# Altium PCB Back.PcbDoc
Units mm, origin at the board's own origin, x right, y up, seen from the top; angles counter-clockwise.
Board outline 72.04 x 19.15 mm, 2 copper layers (Top Layer, Bottom Layer), stack 1.071 mm thick; 13 components, 10 nets, 39 pads, 0 vias.
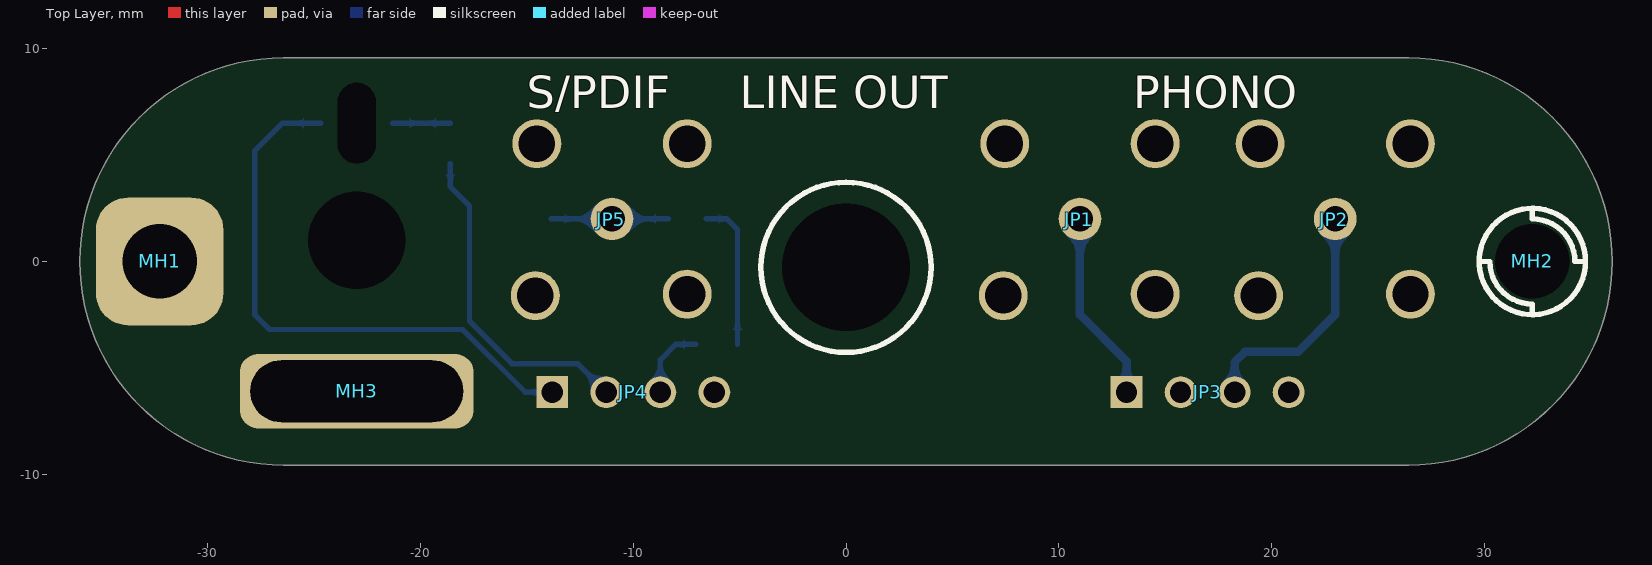
[diagram p0: Top Layer view]
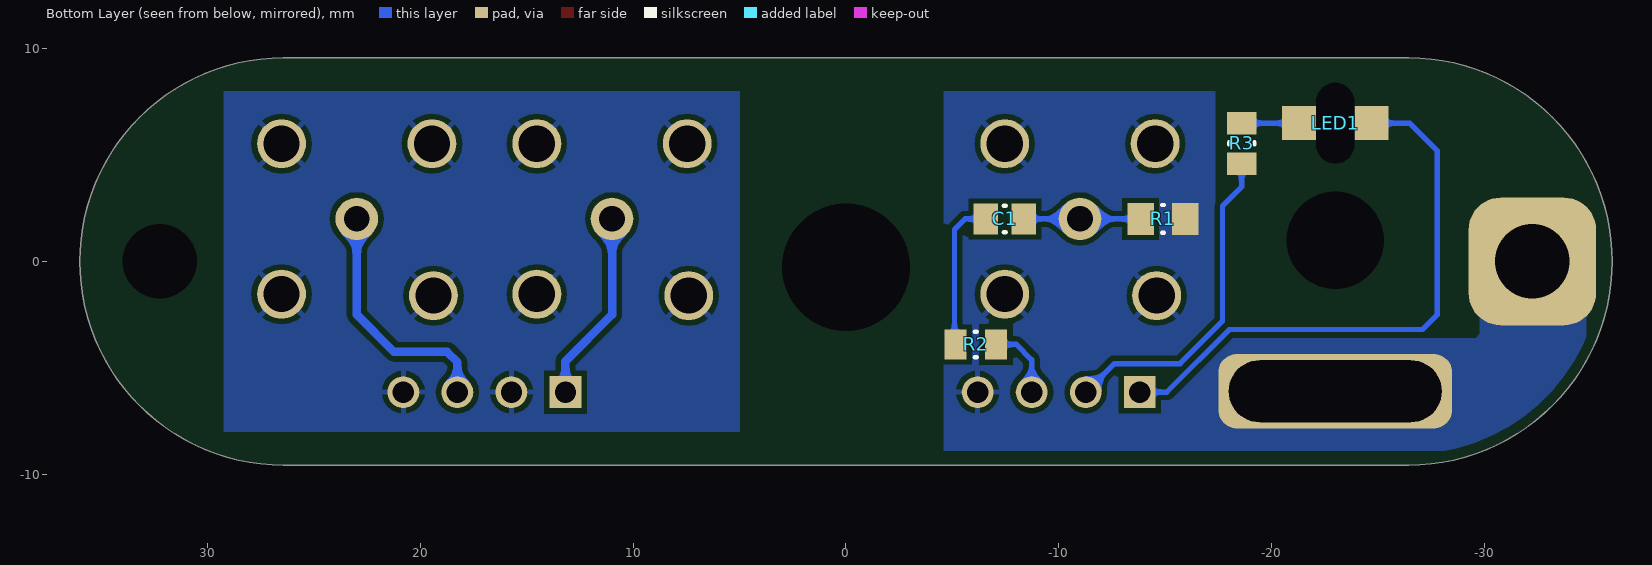
[diagram p1: Bottom Layer view, seen from below]
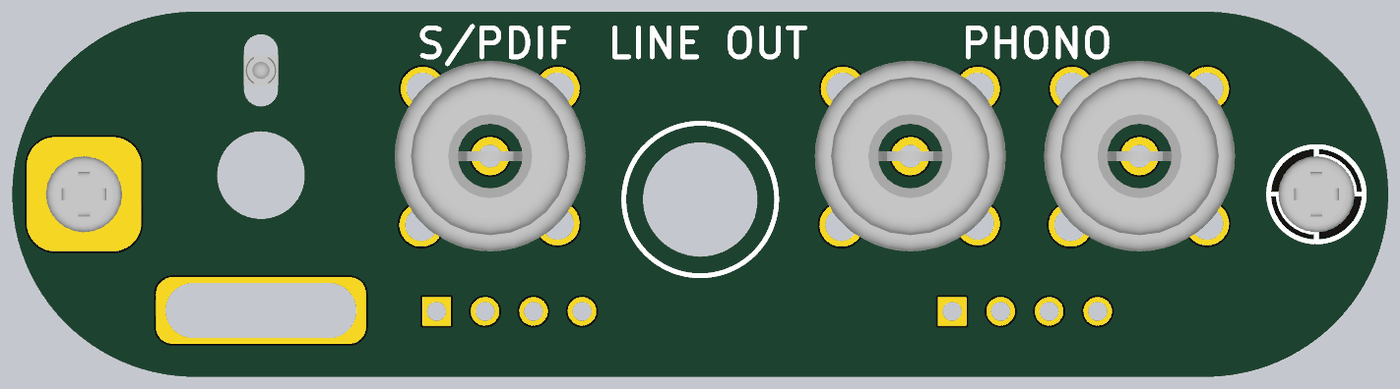
[diagram p2: 3D render of the assembled board from above, using the file's embedded part models]

## Layer stack, top to bottom
Top Solder: solder mask 0.0102, Solder Resist, Dk 3.5
Top Layer: signal copper 0.0356
Dielectric 1: dielectric 1, FR-4, Dk 4.8
Bottom Layer: signal copper 0.0356
Bottom Solder: solder mask 0.0102, Solder Resist, Dk 3.5

## Board outline
-26.445,-9.575 26.445,-9.575 ccw(c26.445,0) 26.445,9.575 -26.445,9.575 ccw(c-26.445,0)

## Design rules (kind name [scope] priority, off if disabled: settings)
BoardOutlineClearance [All] p1: gap=0.5 ignorepadtopadclearanceinfootprint=FALSE
Clearance [All] p1: gap=0.254 ignorepadtopadclearanceinfootprint=FALSE except(0: Arc-Hole Track-Hole SMDPad-Hole THPad-Hole Via-Hole Fill-Hole Poly-Hole Region-Hole Text-Hole)
HoleSize [All] p1: absolutevalues=TRUE maxlimit=6 minlimit=0.3 maxpercent=80.000 minpercent=20.000
PolygonConnect PolygonConnect_GND [InNet('GND') vs HasFootprint('MECH_MHOLE_3.5-GND')] p1: connectstyle=Direct reliefconductorwidth=0.254 reliefentries=4 polygonreliefangle="90 Angle" airgapwidth=0.254
PolygonConnect PolygonConnect_GND_1 [InNet('GND') vs HasFootprint('MECH_USB_MICRO_CUTOUT')] p2: connectstyle=Direct reliefconductorwidth=0.254 reliefentries=4 polygonreliefangle="90 Angle" airgapwidth=0.254
PolygonConnect [All] p3: thpad.connectstyle=Relief thpad.reliefconductorwidth=0.254 thpad.reliefentries=4 thpad.polygonreliefangle="90 Angle" thpad.airgapwidth=0.254 smdpad.connectstyle=Direct smdpad.reliefconductorwidth=0.254 smdpad.reliefentries=4 smdpad.polygonreliefangle="90 Angle" smdpad.airgapwidth=0.254 via.connectstyle=Relief via.reliefconductorwidth=0.254 via.reliefentries=4 via.polygonreliefangle="90 Angle" via.airgapwidth=0.254
RoutingVias [All] p1: holewidth=0.711 width=1.27 viastyle="Through Hole" minholewidth=0.711 minwidth=1.27 maxholewidth=0.711 maxwidth=1.27
SilkToSolderMaskClearance [IsPad] p1: minsilkscreentomaskgap=0 clearancetoexposedcopper=TRUE
SolderMaskExpansion [All] p1: expansion=0.102
Width [All] p1: maxlimit=1 minlimit=0.254 preferedwidth=0.254
28 further rules are at their usual default settings.

## Components (designator, comment, footprint, x,y, rotation, side; value= is the part's Value field where it differs from the comment)
C1 "CAP 10nF 16V 0805(2012)" CAPC0805(2012)145_N -7.464,2 r180 bottom value=10nF
JP1 "RCA RED" CONN_RCA-Lumberg-BTOR 11,2 r45 top value=RED
JP2 "RCA BLACK" CONN_RCA-Lumberg-BTOR 23,2 r45 top value=BLACK
JP3 "CONN_1x4" CONN_HDR1X4-No3D 17,-6.145 r0 top
JP4 "CONN_1x4" CONN_HDR1X4-No3D -10,-6.145 r0 top
JP5 "RCA RED" CONN_RCA-Lumberg-BTOR -11,2 r45 top value=RED
LED1 "BLUE" LED-KPTL-3216QBC -23,6.5 r180 bottom
MH1 "Mounting hole" MECH_MHOLE_3.5-GND -32.265,0 r0 top
MH2 "Mounting hole" MECH_MHOLE_3.5 32.265,0 r0 top
MH3 "Mounting hole" MECH_USB_MICRO_CUTOUT -23,-6.1 r180 top
R1 "75R 1% 0805(2012)" RESC0805(2012)_M -14.9,2 r180 bottom value=75R
R2 "120R 5% 0805(2012)" RESC0805(2012)_N -6.1,-3.9 r0 bottom value=120R
R3 "120R 5% 0805(2012)" RESC0805(2012)_N -18.6,5.55 r90 bottom value=120R

## Footprints (in the part's own frame and the unit in brackets; to place one, negate y for a bottom-side part, rotate by r counter-clockwise, add the part's x,y. Pads: shape width x height; smd on the part's side, far side on the other; paste and mask are expansions set on the pad)
CAPC0805(2012)145_N [mm] "Chip Capacitor, Body 2.0x1.2mm, Height 1.45mm, IPC Medium Density"
  rect 1.15x1.45 smd: 1(-0.9,0) 2(0.9,0)
  silkscreen extent -0.05,-0.62 0.05,0.63, body extent -1.1,-0.72 1.1,0.73, height 1.45
CONN_HDR1X4-No3D [mm] "Connector; Header; 4 Position"
  rect 1.5x1.5 hole 1: 1(-3.81,0)
  round 1.5 hole 1: 2(-1.27,0) 3(1.27,0) 4(3.81,0)
CONN_RCA-Lumberg-BTOR [mm] "BTOR 1"
  round 2 hole 1.2: 1(0,0)
  round 2.3 hole 1.7: 2(-5.1,0) 2(0,5) 2(0,-5) 2(5,0)
  body extent -5,-5 5,5, height 17.01
LED-KPTL-3216QBC [mm] "Reverse"
  rrect50% 0x0 hole 1.8 slot 3.8 at 90 deg unplated: 4(0,0)
  rect 1.6x1.6 smd: A(1.7,0) K(-1.7,0)
  body extent -1.6,-0.8 1.6,0.8, height 0.31
MECH_MHOLE_3.5 [mm] "Mounting hole 3.5mm"
  round 0 hole 3.5 unplated mask+2.5: 0(0,0)
  silkscreen extent -2.5,-2.5 2.5,2.5, body extent -2,-2 2,2, height 1.61
MECH_MHOLE_3.5-GND [mm] "Mounting hole 3.5mm"
  rrect50% 6x6 hole 3.5: 0(0,0)
  body extent -2,-2 2,2, height 1.61
MECH_USB_MICRO_CUTOUT [mm] "Molex"
  rrect50% 11x3.5 hole 2.9 slot 10 at 0 deg: 0(0,0)
RESC0805(2012)_M [mm] "Chip Resistor, Body 2.0x1.3mm, IPC Low Density"
  rect 1.25x1.5 smd: 1(-1.05,0) 2(1.05,0)
  silkscreen extent -0.05,-0.65 0.05,0.65, body extent -1.1,-0.67 1.1,0.67, height 0.7
RESC0805(2012)_N [mm] "Chip Resistor, Body 2.0x1.3mm, IPC Medium Density"
  rect 1.05x1.4 smd: 1(-0.95,0) 2(0.95,0)
  silkscreen extent -0.05,-0.6 0.05,0.6, body extent -1.1,-0.67 1.1,0.68, height 0.7

## Part data
C1: library part CMP-1036-03822-1, "CAP 10nF 16V ±20% 0805 (2012 Metric) Thickness 1.45mm SMD", Case-EIA=0805, Case-Metric=2012, Rated Voltage="16 V", Tolerance=±20%, Max Thickness="1.45 mm", Technology=SMT
JP1 JP5: library part CONN_RCA_LUMBERG_BTOR_1_RED, "RCA panel-mount socket red, 1553 02 rot, Lumberg Connect GmbH", MPN="BTOR 1 ROT", ELFA=300-68-470, Farnell=1368644
JP2: library part CONN_RCA_LUMBERG_BTOR_1_BLACK, "RCA panel-mount socket red, 1553 02 rot, Lumberg Connect GmbH", MPN="BTOR 1 SCHWARZ", ELFA=300-68-471, Farnell=1217030
JP3 JP4: library part CONN_MHDR_1x4, "Header, 4-Pin", MPN=0470531000, DigiKey=WM4330-ND, LatestRevisionDate=17-Jul-2002, LatestRevisionNote="Re-released for DXP Platform.", Publisher="Altium Limited"
LED1: library part LED-BLUE-KPTL-3216QBC-D-01, "LED BLUE", MPN=KPTL-3216QBC-D-01, Farnell=2217907, VF=3.3V
MH1 MH2: library part MECH_MHOLE
MH3: library part MECH_MICRO_B_CUTOUT
R1: library part CMP-1013-00383-1, "75R 0.125W 1% 0805 (2012 Metric)  SMD", Case-EIA=0805, Case-Metric=2012, Power="0.125 W", Tolerance="1 %", Technology=SMT
R2 R3: library part CMP-1013-00052-1, "120R 0.125W 5% 0805 (2012 Metric)  SMD", Case-EIA=0805, Case-Metric=2012, Power="0.125 W", Tolerance="5 %", Technology=SMT

## Free pads (board coordinates)
  rect 1.8x1.05 hole 4.6 unplated: 0(-23,1)
  rect 0x0 hole 6 unplated: 0(0,-0.275)

## Nets (pads, with @x,y where several pads share a name; then routed paths per layer and width w, separated by ;. In a path a pad name is that pad's centre, name@x,y a point inside that pad or via, vN(x,y) a via of type N, cw(c..) or ccw(c..) an arc to the next point about the centre after c; other vN are vias at no path point)
GND: JP4.4 JP5.2 MH1.0 MH3.0 R1.2
GNDA: JP1.2 JP2.2 JP3.2 JP3.4
LEFT: JP1.1 JP3.1 | length 9.1
  Bottom Layer w0.4: JP1.1 11,-2.5 13.19,-4.69 JP3.1
NetC1_1: C1.1 R2.2 | length 7.1
  Bottom Layer w0.254: C1.1 -5.6,2 -5.1,1.5 R2.2@-5.1,-3.9
NetC1_2: C1.2 JP5.1 R1.1 | length 5.5
  Bottom Layer w0.254: R1.1 JP5.1 C1.2
NetJP4_2: JP4.2 R3.1 | length 15.6
  Bottom Layer w0.254: R3.1 -18.6,3.5 -17.7,2.6 -17.7,-2.806 -15.706,-4.8 -12.615,-4.8 JP4.2
NetJP4_3: JP4.3 R2.1 | length 3.5
  Bottom Layer w0.254: JP4.3 -8.73,-4.625 -8.005,-3.9 R2.1
NetLED1_K: LED1.K R3.2 | length 2.7
  Bottom Layer w0.254: LED1.K R3.2
RIGHT: JP2.1 JP3.3 | length 11.6
  Bottom Layer w0.4: JP3.3 18.27,-4.73 18.75,-4.25 21.25,-4.25 23,-2.5 JP2.1
VBUS: JP4.1 LED1.A | length 26.8
  Bottom Layer w0.254: LED1.A -26.5,6.5 -27.8,5.2 -27.8,-2.5 -27.1,-3.2 -18.024,-3.2 -15.079,-6.145 JP4.1
pads on no net: LED1.4 MH2.0

## Polygon pours and split planes (outlines as drawn)
GND on Bottom Layer "GND" (solid, remove dead copper, pour order 2): -17.35,8 -17.35,-8.9 -4.6,-8.9 -4.6,8
GNDA on Bottom Layer "GND" (solid, remove dead copper, pour order 0): 5,8 5,-8 29.25,-8 29.25,8
GND on Bottom Layer "Bottom Layer-GND" (solid, pour order 3): -34.8,2.5 -34.8,-8.9 -13.827,-8.9 -13.827,-3.6 -29.6,-3.6 -29.8,-3.4 -29.8,2.5

## Silkscreen, mask and mechanical layers (free items; w line width, h text height)
Top Overlay:
  circle w0.254: c0,-0.275 r4
  text "S/PDIF" at -15,7.2 h1.52
  text "LINE OUT" at -5,7.2 h1.52
  text "PHONO" at 13.5,7.2 h1.52
Mechanical 1:
  the board outline again, w0.2